# Altium PCB pcb.PcbDoc
Units mm, origin at the board's own origin, x right, y up, seen from the top; angles counter-clockwise.
Board outline 81.92 x 55.6 mm, 2 copper layers (Top Layer, Bottom Layer); 23 components, 18 nets, 118 pads, 0 vias.
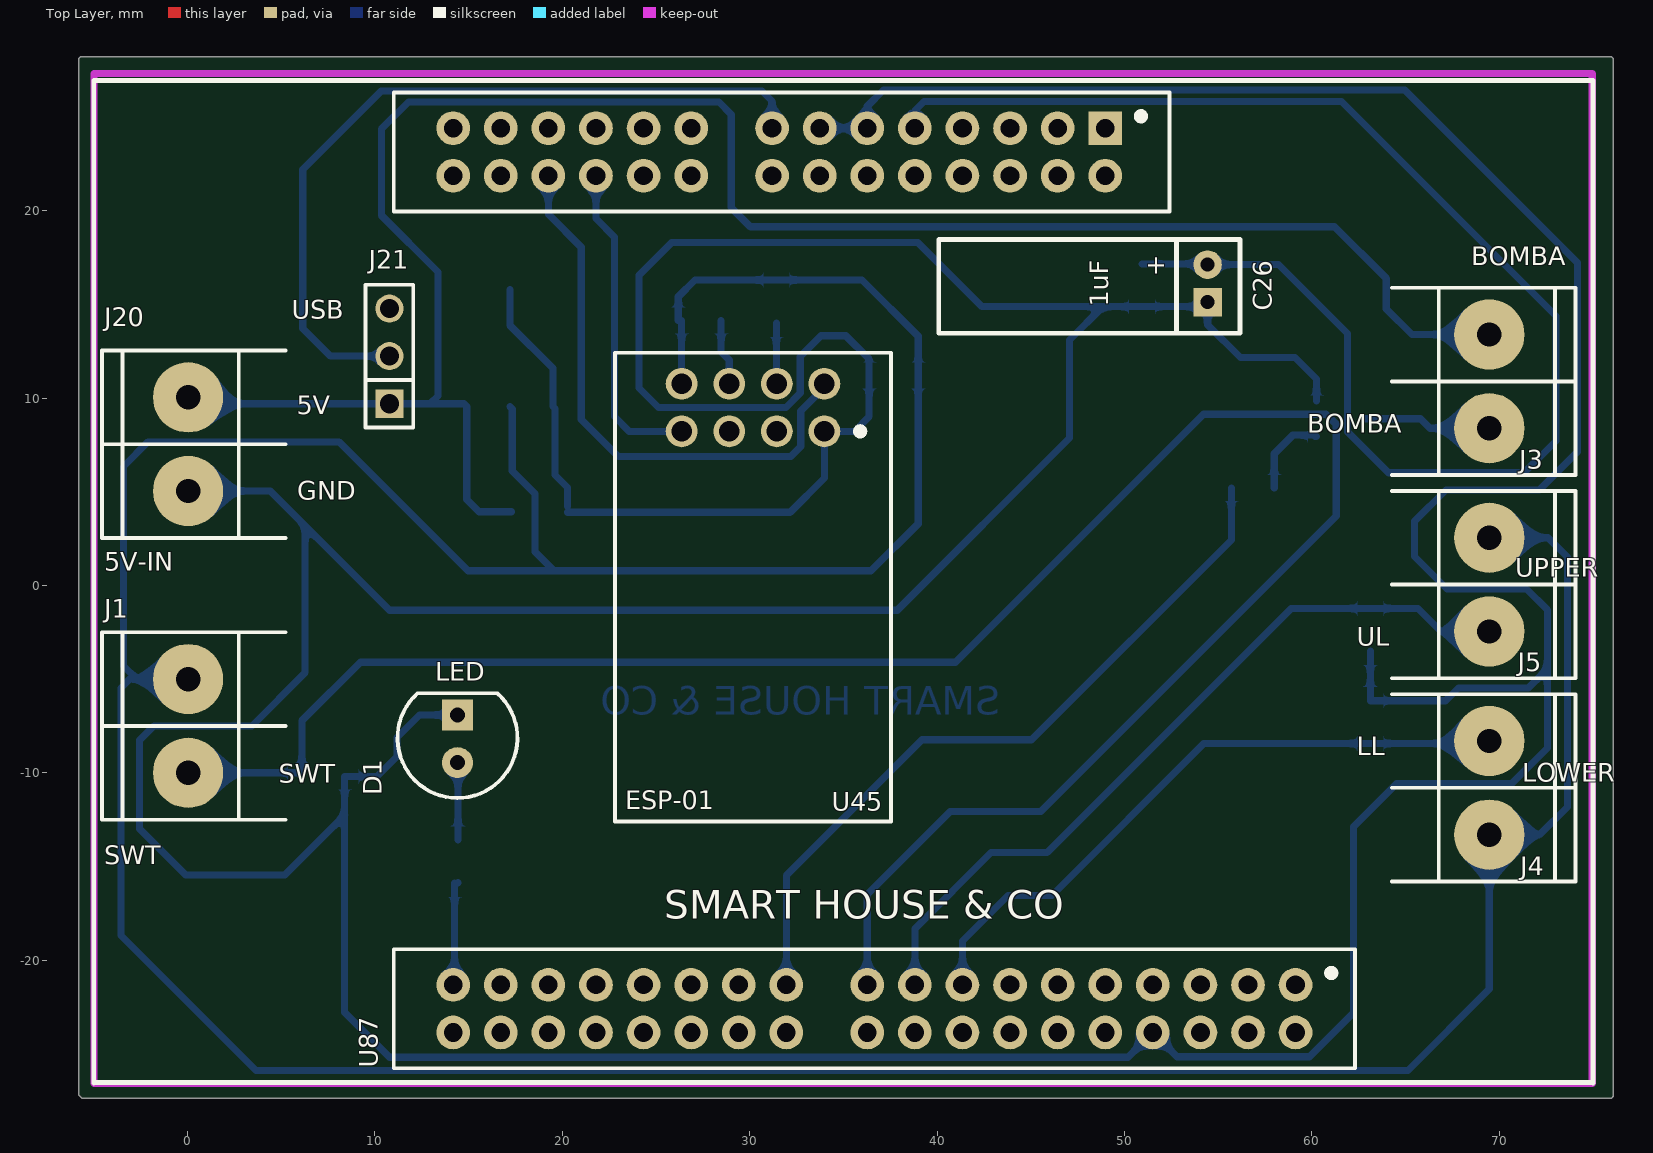
[diagram p0: Top Layer view]
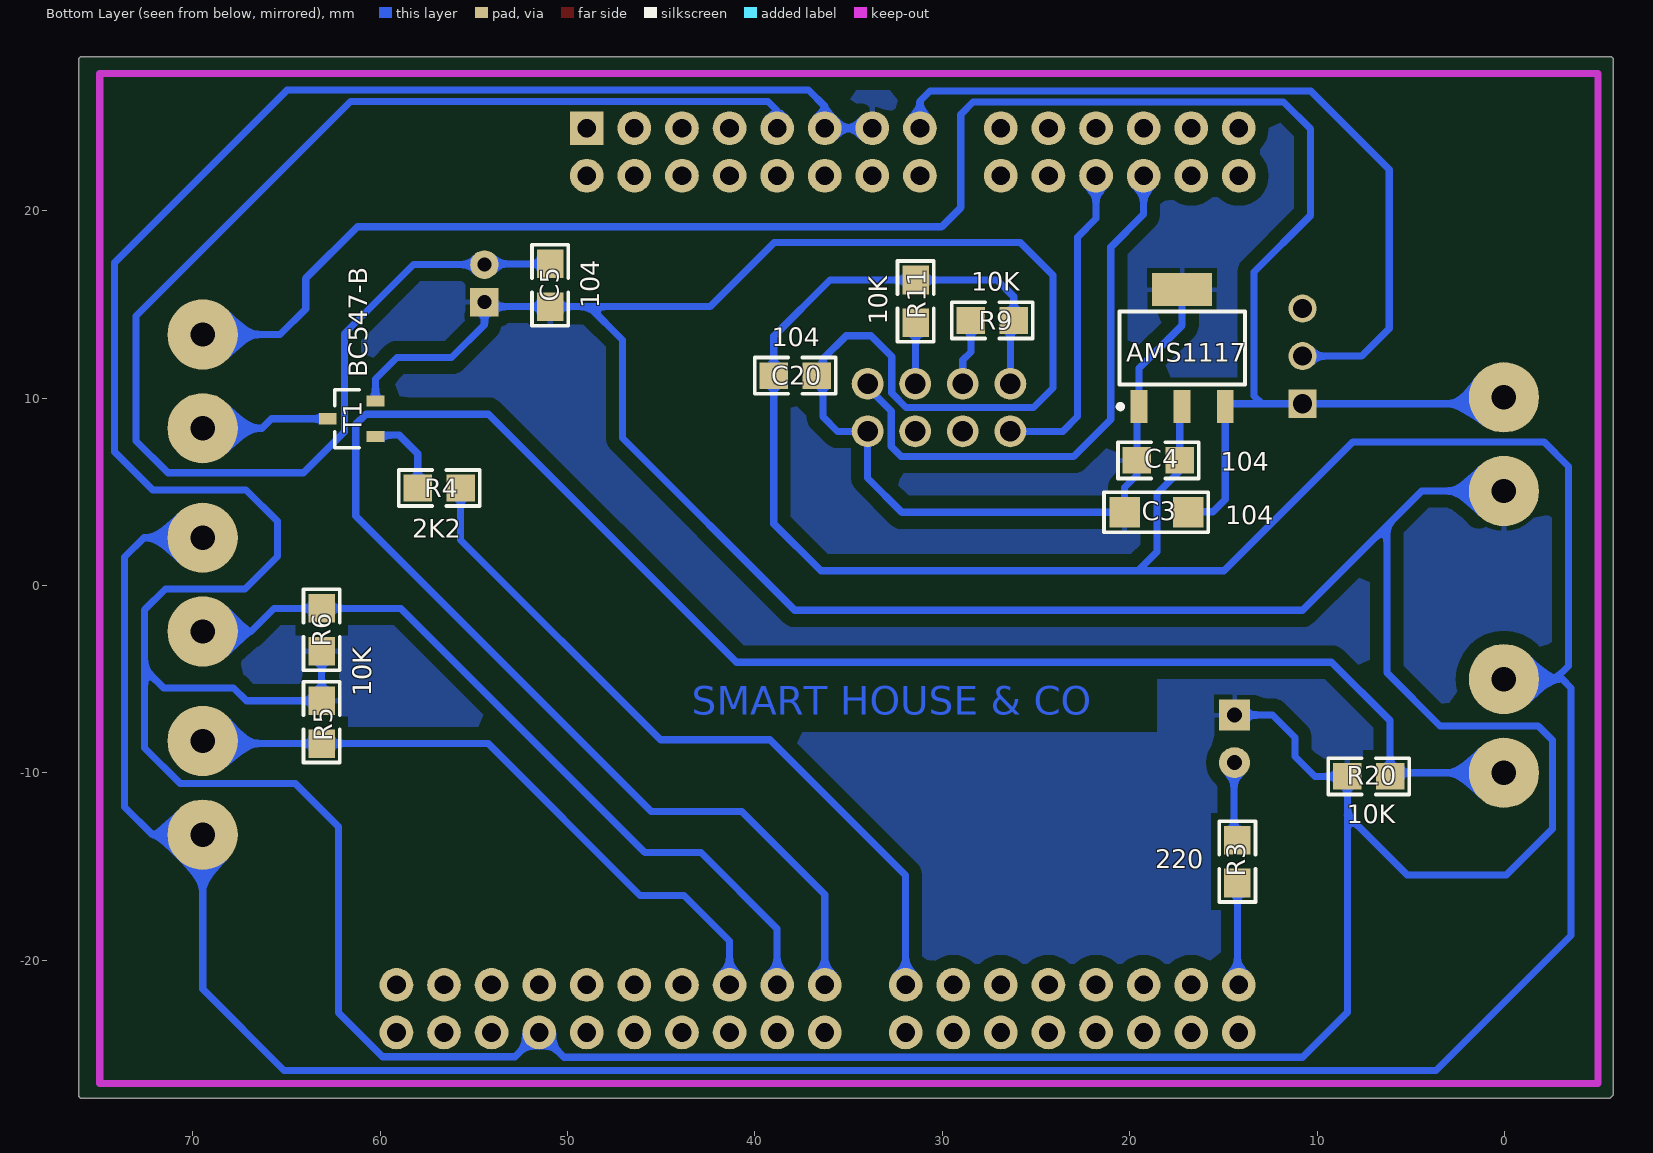
[diagram p1: Bottom Layer view, seen from below]

## Layer stack, top to bottom
Top Solder: solder mask 0.0102, Solder Resist, Dk 3.5
Top Layer: signal copper 0.0356
Dielectric 1: dielectric 0.32, FR-4, Dk 4.8
Bottom Layer: signal copper 0.0356
Bottom Solder: solder mask 0.0102, Solder Resist, Dk 3.5

## Board outline
-5.722,-27.269 cw(c-5.63,-27.102) -5.821,-27.102 -5.821,28.042 cw(c-5.63,28.042) -5.618,28.232 cw(c-5.605,28.042) -5.605,28.232 75.904,28.232 cw(c75.904,28.042) 76.095,28.042 76.095,-27.178 cw(c75.904,-27.178) 75.904,-27.369 -5.554,-27.369 cw(c-5.554,-27.178)

## Design rules (kind name [scope] priority, off if disabled: settings)
Clearance POLYGON [All vs InPolygon] p1: gap=0.7
Clearance [All] p2: gap=0.2
PolygonConnect [All] p1: connectstyle=Relief reliefconductorwidth=0.254 reliefentries=4 polygonreliefangle="90 Angle" airgapwidth=0.254
RoutingVias [All] p1: holewidth=0.711 width=1.27 viastyle="Through Hole" minholewidth=0.711 minwidth=1.27 maxholewidth=0.711 maxwidth=1.27
SolderMaskExpansion [All] p1: expansion=0.102
UnpouredPolygon [All] p1: allowunpoured=FALSE
Width [All] p1: maxlimit=2 minlimit=0.254 preferedwidth=0.381 toplayer_maxwidth=0.508 minimp=50.000000 maximp=50.000000 favimp=50.000000
29 further rules are at their usual default settings.

## Components (designator, comment, footprint, x,y, rotation, side; value= is the part's Value field where it differs from the comment)
AMS1117 "AMS1117" AMS1117 17.196,12.675 r90 bottom
C3 "104" 1206 18.567,3.912 r0 bottom
C4 "104" 0805 18.466,6.68 r0 bottom
C5 "104" 0805 50.927,16.027 r90 bottom
C20 "104" 0805 37.846,11.201 r180 bottom
C26 "1uF" CAP100RP 54.432,16.129 r270 top
D1 "LED" LED5 14.402,-8.179 r90 top
J1 "SWT" BORNERA2 0.025,-7.493 r0 top
J3 "BOMBA" BORNERA2 69.469,10.897 r180 top
J4 "LOWER" BORNERA2 69.469,-10.795 r180 top
J5 "UPPER" BORNERA2 69.469,0.051 r180 top
J20 "5V-IN" BORNERA2 0.025,7.544 r0 top
J21 "" SIP3 10.77,12.243 r90 top
R3 "220" 0805 14.249,-14.732 r270 bottom
R4 "2K2" 0805 56.845,5.207 r180 bottom
R5 "10K" 0805 63.119,-7.29 r270 bottom
R6 "10K" 0805 63.119,-2.362 r90 bottom
R9 "10K" 0805 27.33,14.148 r0 bottom
R11 "10K" 0805 31.42,15.164 r270 bottom
R20 "10K" 0805 7.239,-10.185 r0 bottom
T1 "BC547-B" SOT23 60.249,7.95 r90 bottom
U45 "ESP-01" ESP-01 33.985,10.77 r180 top (schematic designator *)
U87 "FRDM-KL25Z" MICRO 35.128,1.168 r180 top

## Footprints (in the part's own frame and the unit in brackets; to place one, negate y for a bottom-side part, rotate by r counter-clockwise, add the part's x,y. Pads: shape width x height; smd on the part's side, far side on the other; paste and mask are expansions set on the pad)
0805 [mil] "Pasivo 0805"
  rect 60x56 smd: 1(-45,0) 2(45,0)
  silkscreen extent -85,-38 85,38, body extent -39,-25 39,25, height 15
1206 [mil] "Pasivo 1206"
  rect 64x64 smd: 1(-67,0) 2(67,0)
  silkscreen extent -109,-42 110,42, body extent -62,-32 63,31, height 20
AMS1117 [mm] "SOT223, 4-Leads, Body 6,50x7,00mm (avg), Pitch 2,30mm, IPC Medium Density"
  rect 1.75x0.9 smd: 1(-3.125,-2.3) 2(-3.125,2.3) 3(-3.125,0)
  rect 1.75x3.2 smd: 2(3.125,0)
  silkscreen extent -3.25,-3.35 1.95,3.43, body extent -3.48,-3.25 3.48,3.25, height 1.7
BORNERA2 [mm] "Bornera con Tornillos 5mm separaci�n"
  round 3.75 hole 1.3: 1(0,2.5) 2(0,-2.5)
  silkscreen extent -4.6,-5 5.2,5, body extent -3.76,-4.89 3.94,5.61, height 10
CAP100RP [mil] "Body diameter 5mm"
  round 60 hole 30: 1(-39.37,0)
  rect 60x60 hole 30: 2(39.37,0)
  silkscreen extent -92,-565 105,68, body extent -97,-566 107,-65, height 220
ESP-01 [mm]
  round 1.7 hole 1.1: 1(0,2.54) 2(2.54,2.54) 3(5.08,2.54) 4(7.62,2.54) 5(0,0) 6(2.54,0) 7(5.08,0) 8(7.62,0)
  silkscreen extent -3.56,-1.65 11.18,23.37, body extent -3.43,-1.52 11.07,23.28, height 14.88
LED5 [mil]
  round 65 hole 32: 1(-50,0)
  rect 65x65 hole 32: 2(50,0)
  silkscreen extent -124,-126 96,126, body extent -117,-117 97,120, height 485
MICRO [mm]
  rect 1.8x1.8 hole 1: 1(-13.843,-23.241)
  round 1.8 hole 1: 2(-13.843,-20.701) 3(-11.303,-23.241) 4(-11.303,-20.701) 5(-8.763,-23.241) 6(-8.763,-20.701) 7(-6.223,-23.241) 8(-6.223,-20.701) 9(-3.683,-23.241) 10(-3.683,-20.701) 11(-1.143,-23.241) 12(-1.143,-20.701) 13(1.397,-23.241) 14(1.397,-20.701) 15(3.937,-23.241) 16(3.937,-20.701) 17(8.255,-23.241) 18(8.255,-20.701) 19(10.795,-23.241) 20(10.795,-20.701) 21(13.335,-23.241) 22(13.335,-20.701) 23(15.875,-23.241) 24(15.875,-20.701) 25(18.415,-23.241) 26(18.415,-20.701) 27(20.955,-23.241) 28(20.955,-20.701) 29(-24.003,22.479) 30(-24.003,25.019) 31(-21.463,22.479) 32(-21.463,25.019) 33(-18.923,22.479) 34(-18.923,25.019) 35(-16.383,22.479) 36(-16.383,25.019) 37(-13.843,22.479) 38(-13.843,25.019) 39(-11.303,22.479) 40(-11.303,25.019) 41(-8.763,22.479) 42(-8.763,25.019) 43(-6.223,22.479) 44(-6.223,25.019) 45(-3.683,22.479) 46(-3.683,25.019) 47(-1.143,22.479) 48(-1.143,25.019) 49(3.175,22.479) 50(3.175,25.019) 51(5.715,22.479) 52(5.715,25.019) 53(8.255,22.479) 54(8.255,25.019) 55(10.795,22.479) 56(10.795,25.019) 57(13.335,22.479) 58(13.335,25.019) 59(15.875,22.479) 60(15.875,25.019) 61(18.415,22.479) 62(18.415,25.019) 63(20.955,22.479) 64(20.955,25.019)
  silkscreen extent -39.88,-25.78 40.13,27.72, body extent -25.27,-24.51 22.22,26.29, height 1.5
SIP3 [mm]
  rect 1.5x1.5 hole 1.016: 1(-2.54,0)
  round 1.5 hole 1.016: 2(0,0) 3(2.54,0)
  silkscreen extent -3.81,-1.27 3.81,1.27, body extent -3.81,-1.3 3.81,1.24, height 8.38
SOT23 [mm]
  rect 0.6x0.95 smd: 1(0,0) 2(0.95,2.55) 3(1.9,0)
  silkscreen extent -0.6,0.88 2.5,2.17, body extent -0.53,-0.25 2.47,2.88, height 1

## Part data
C3 C4 C5 C20: library part CAP, "cap"
C26: library part CAPPOL, "Cap polarizado"
J1 J3 J4 J5 J20: library part Bornera_2, "Bornera de 2 pines"
J21: library part JUMPER3
R3 R4 R5 R6 R9 R11 R20: library part RES, "Resistencia"
T1: library part "TRANSISTOR NPN"

## Nets (pads, with @x,y where several pads share a name; then routed paths per layer and width w, separated by ;. In a path a pad name is that pad's centre, name@x,y a point inside that pad or via, vN(x,y) a via of type N, cw(c..) or ccw(c..) an arc to the next point about the centre after c; other vN are vias at no path point)
3V3: AMS1117.3 C4.1 C20.1 J1.1 J4.1 J5.2 R9.1 R11.1 U45.8 | length 225.8
  Bottom Layer w0.381: AMS1117.3 17.323,9.423 C4.1 17.323,6.121 18.542,4.902 18.542,1.803 19.558,0.787 ; R9.1 26.187,15.418 27.076,16.307 R11.1 35.992,16.307 38.989,13.31 C20.1 38.989,3.302 36.474,0.787 19.558,0.787 ; U45.8 R9.1@26.365,14.148 ; J5.2 72.608,2.551 73.635,1.524 73.635,-11.811 72.151,-13.295 J4.1 69.469,-21.539 65.127,-25.882 3.657,-25.882 -3.556,-18.669 -3.556,-5.461 -3.088,-4.993 J1.1 -2.729,-4.993 -3.429,-4.293 -3.429,6.35 -2.108,7.671 8.086,7.671 14.969,0.787 19.558,0.787
5V: AMS1117.1 C3.1 J3.2 J20.1 J21.1 | length 107.5
  Bottom Layer w0.381: J20.1 0.366,9.703 J21.1 12.954,9.703 ; C3.1@17.272,3.937 15.545,3.937 14.896,4.586 AMS1117.1 14.743,9.703 12.954,9.703 ; J3.2 65.34,13.397 63.97,14.766 63.97,16.396 61.214,19.152 30.031,19.152 29.015,20.168 29.015,25.146 28.355,25.806 11.786,25.806 10.338,24.359 10.338,19.761 13.36,16.739 13.36,10.109 12.954,9.703
BOMBA: R4.2 U87.49 | length 39.8
  Bottom Layer w0.381: U87.49 31.953,-15.469 39.192,-8.23 45.034,-8.23 55.702,2.438 R4.2
GND: AMS1117.2 C3.2 C4.2 C5.1 C20.2 C26.2 D1.2 J20.2 R5.1 R6.1 R20.2 T1.3 U45.1 U87.11 U87.13 U87.36 | length 392.9
  Bottom Layer w0.381: J20.2 4.409,5.044 6.274,3.179 ; D1.2 12.37,-6.909 11.176,-8.103 11.176,-9.119 10.109,-10.185 R20.2 8.382,-12.243 ; AMS1117.2@17.196,15.8 17.196,13.894 19.496,11.594 19.496,9.55 19.609,9.437 C4.2 19.609,5.893 20.269,5.232 C3.2@20.269,4.216 ; C3.2 32.156,3.912 33.985,5.74 U45.1 35.585,8.23 36.373,9.017 36.373,12.09 35.128,13.335 33.807,13.335 32.698,12.226 32.698,10.268 31.93,9.5 25.125,9.5 24.088,10.536 24.088,16.561 25.84,18.313 38.964,18.313 42.393,14.884 48.844,14.884 ; U87.13 U87.11 36.271,25.578 37.135,26.441 64.956,26.441 74.168,17.23 74.168,7.137 72.136,5.105 67.158,5.105 65.481,3.429 65.481,1.549 67.208,-0.178 71.45,-0.178 72.568,-1.295 72.568,-4.445 ; T1.3 60.249,11.024 59.106,12.167 56.185,12.167 54.432,13.919 C26.2 54.188,14.884 C5.1 48.844,14.884 ; R6.1 R5.1 67.132,-6.147 67.818,-5.461 71.552,-5.461 72.568,-4.445 ; 6.274,3.179 10.773,-1.321 37.871,-1.321 47.066,7.874 47.066,13.106 48.844,14.884 ; 6.274,3.179 6.274,-4.648 3.429,-7.493 -1.803,-7.493 -2.565,-8.255 -2.565,-12.979 -0.102,-15.443 5.182,-15.443 8.382,-12.243 ; 8.382,-12.243 8.382,-22.784 10.77,-25.171 50.19,-25.171 U87.36 52.807,-25.146 59.876,-25.146 62.23,-22.792 62.23,-12.861 64.525,-10.566 70.671,-10.566 72.568,-8.67 72.568,-4.445
"LOWER LEVEL": J4.2 R5.2 U87.43 | length 34.9
  Bottom Layer w0.381: U87.43 41.351,-18.974 43.79,-16.535 46.126,-16.535 54.229,-8.433 R5.2 69.331,-8.433 J4.2
NetC5_2: C5.2 C26.1 U87.9 | length 77.3
  Bottom Layer w0.381: U87.9 38.811,25.349 39.294,25.832 61.578,25.832 73.025,14.385 73.025,7.722 71.323,6.02 64.093,6.02 61.908,8.204 61.908,13.446 58.225,17.129 C26.1 54.432,17.17 C5.2
NetD1_1: D1.1 R3.1 | length 4.1
  Bottom Layer w0.381: D1.1 14.427,-9.474 R3.1@14.427,-13.564
NetJ3_1: J3.1 T1.2 | length 6.9
  Bottom Layer w0.381: T1.2 65.801,8.9 66.305,8.397 J3.1
NetR3_2: R3.2 U87.63 | length 5.5
  Bottom Layer w0.381: U87.63 14.249,-21.234 R3.2 ; R3.2@14.427,-15.875 R3.2@14.427,-15.85
NetR4_1: R4.1 T1.1 | length 4.6
  Bottom Layer w0.381: R4.1 57.988,7.036 58.979,8.026 60.173,8.026 60.173,7.95 T1.1
NetR9_2: R9.2 U45.7 | length 3.6
  Bottom Layer w0.381: R9.2 28.473,12.471 28.905,12.04 U45.7
NetR11_2: R11.2 U45.6 | length 3.3
  Bottom Layer w0.381: R11.2 31.42,10.795 U45.6
RXD: U45.4 U87.22 | length 17.2
  Bottom Layer w0.381: U87.22 21.793,19.583 22.784,18.593 22.784,9.017 23.571,8.23 U45.4
SWITCH: J1.2 R20.1 U87.47 | length 114.4
  Bottom Layer w0.381: J1.2 5.904,-9.993 R20.1 6.096,-7.214 9.22,-4.089 40.979,-4.089 54.212,9.144 60.759,9.144 61.299,8.604 61.299,3.717 45.529,-12.052 40.704,-12.052 36.271,-16.485 U87.47
TXD: U45.5 U87.24 | length 30.4
  Bottom Layer w0.381: U87.24 19.253,19.812 21.006,18.059 21.006,8.865 22.987,6.883 32.19,6.883 32.724,7.417 32.724,9.322 33.985,10.583 U45.5
"UPPER LEVEL": J5.1 R6.2 U87.45 | length 41.2
  Bottom Layer w0.381: U87.45 38.811,-18.313 42.875,-14.249 45.872,-14.249 58.903,-1.219 R6.2 65.668,-1.219 66.898,-2.449 J5.1
USB: J21.3
VDD: J21.2 U87.15 | length 42.2
  Bottom Layer w0.381: J21.2 7.62,12.243 6.147,13.716 6.147,22.2 10.335,26.387 30.661,26.387 31.191,25.857 U87.15
pads on no net: U45.2 U45.3 U87.1 U87.2 U87.3 U87.4 U87.5 U87.6 U87.7 U87.8 U87.10 U87.12 U87.14 U87.16 U87.17 U87.18 U87.19 U87.20 U87.21 U87.23 U87.25 U87.26 U87.27 U87.28 U87.29 U87.30 U87.31 U87.32 U87.33 U87.34 U87.35 U87.37 U87.38 U87.39 U87.40 U87.41 U87.42 U87.44 U87.46 U87.48 U87.50 U87.51 U87.52 U87.53 U87.54 U87.55 U87.56 U87.57 U87.58 U87.59 U87.60 U87.61 U87.62 U87.64

## Polygon pours and split planes (outlines as drawn)
GND on Bottom Layer "POLYGON" (solid, remove dead copper, pour order 5): -8.458,33.757 75.895,33.757 76.454,33.198 79.781,29.87 79.781,-31.598 -8.636,-31.598 -10.008,-30.226

## Keep-outs
Keep-Out Layer:
  lines w0.381: -5.004,-26.583 -5.004,27.33 74.964,27.33 74.964,-26.583 -4.953,-26.583

## Other copper
Bottom Layer:
  text "SMART HOUSE & CO" at 43.358,-6.883 h1.52

## Silkscreen, mask and mechanical layers (free items; w line width, h text height)
Top Overlay:
  text "USB" at 5.563,14.249 h1
  text "5V" at 5.817,9.144 h1
  text "BOMBA" at 59.741,8.153 h1
  text "GND" at 5.842,4.572 h1
  text "UL" at 62.382,-3.226 h1
  text "LL" at 62.382,-9.068 h1
  text "SWT" at 4.851,-10.516 h1
  text "SMART HOUSE & CO" at 25.425,-17.78 h1.52
Mechanical 32:
  lines w0.381: -5.63,28.042 -5.63,-27.371 75.904,-27.371 75.904,28.042 -5.605,28.042

## Text inside footprints (layer, text, board x,y; h text height)
C26: Top Overlay "+" at 51.257,17.653 h1.02 r270